# Altium PCB Proyecto_receptaculo_PCB.PcbDoc (part 2 of 2)
Units mm, origin at the board's own origin, x right, y up, seen from the top; angles counter-clockwise.
Board outline 153.95 x 97.18 mm, 4 copper layers (Top Layer, Sources, Ground, Bottom Layer), stack 0.603 mm thick; 102 components, 76 nets, 373 pads, 119 vias.
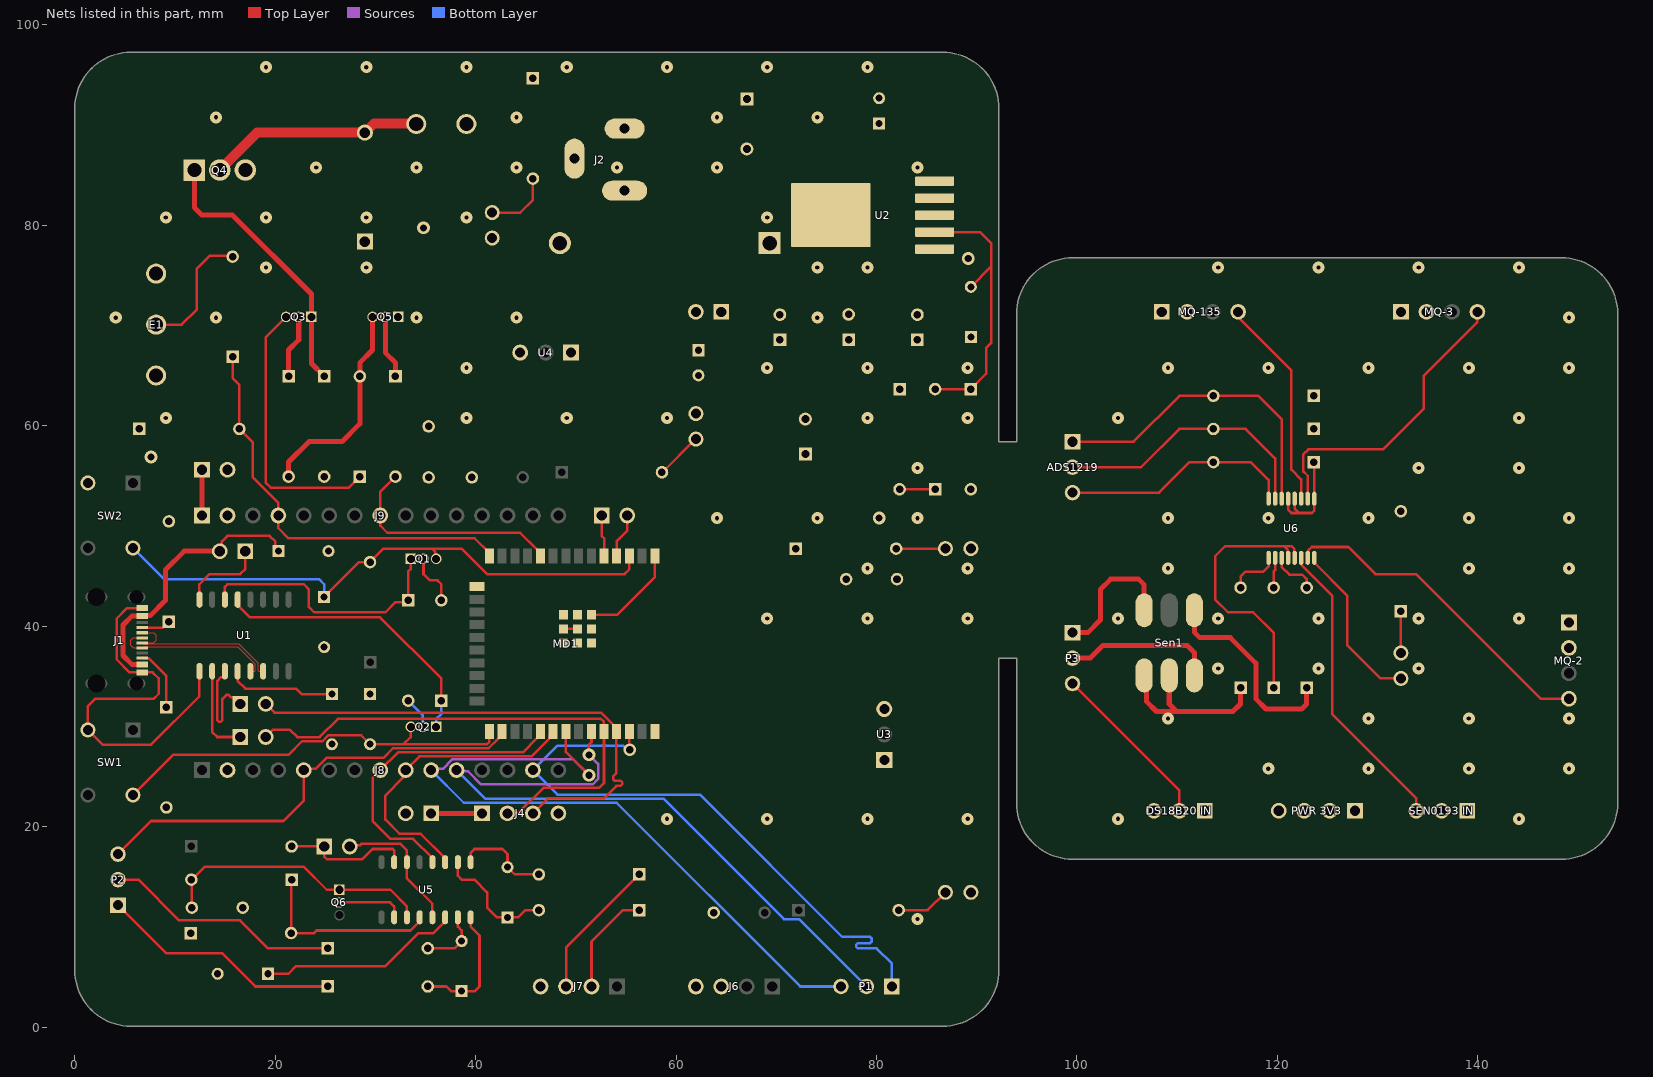
[diagram p4: the nets of this part, all layers, seen from the top]

## Via types
v1: diameter 1.2, hole 0.42, Top Layer to Bottom Layer, tented both sides, 102 vias
v2: diameter 1.27, hole 0.711, Top Layer to Bottom Layer, 5 vias
v3: diameter 1.27, hole 0.711, Top Layer to Bottom Layer, tented both sides, 4 vias
v4: diameter 5.3, hole 3, Top Layer to Bottom Layer, 4 vias
v5: diameter 5, hole 3, Top Layer to Bottom Layer, 3 vias
v6: diameter 1.2, hole 0.42, Top Layer to Bottom Layer, tented top, 1 vias

## Nets (pads, with @x,y where several pads share a name; then routed paths per layer and width w, separated by ;. In a path a pad name is that pad's centre, name@x,y a point inside that pad or via, vN(x,y) a via of type N, cw(c..) or ccw(c..) an arc to the next point about the centre after c; other vN are vias at no path point) (continued)
3V3_VCC: "DS18B20 IN.1" "PWR 3V3.1" "PWR 3V3.2" "SEN0193 IN.2" MQ-2.1 MQ-3.1 MQ-135.1 R4.1 R5.1 R26.2 R27.1 R28.1 Sen1.1 U6.9 U6.12 U6.13 | length 30.9
  Top Layer w0.254: U6.13@121.073,52.734 121.073,51.633 121.398,51.308 122.16,51.308 ; U6.12@121.723,52.734 121.723,51.745 122.16,51.308 ; R28.1@123.604,56.388 123.673,56.319 U6.9@123.673,52.734 123.673,51.551 123.43,51.308 122.16,51.308
  Top Layer w0.5: Sen1.1@111.706,41.604 111.706,39.41 112.254,38.862 115.302,38.862 117.842,36.322 117.842,32.766 118.858,31.75 122.414,31.75 122.922,32.258 R5.1@122.922,33.862
  other v1: 119.092,25.79 129.092,25.79 139.092,25.79 149.092,25.79 114.092,35.79 124.092,35.79 134.092,35.79 109.092,45.79 139.092,45.79 149.092,45.79 134.092,55.79 144.092,55.79 109.092,65.79 119.092,65.79 129.092,65.79 139.092,65.79 149.092,65.79 114.092,75.79 124.092,75.79 134.092,75.79 144.092,75.79
5V_DC-DC: C4.2 C5.1 C6.1 C7.1 L1.1 L2.1 L3.1 R6.1 R14.1 U3.3 V+Cnv.1
  other v1: 79.092,45.79 89.092,45.79 84.092,55.79 69.092,65.79 79.092,65.79 89.092,65.79
  other v2: 80.264,50.8
5V_EXTERN: J4.1 V+Ext.1 | length 5.1
  Top Layer w0.5: V+Ext.1@35.56,21.336 J4.1@40.64,21.336
5V_Winner: 5VWin.2 C9.1 U1.16 U4.3 V+Cnv.2 V+Ext.2 V+USB.1 | length 8.5
  Top Layer w0.254: U1.16@12.446,42.672 12.446,44.196 13.462,45.212 16.51,45.212 17.018,45.72 V+USB.1@17.018,47.498
  other v1: 39.092,65.79
  other v2: 7.62,56.896
+12_Vin: C2.2 C3.1 D2.1 E1.A1 In1.A1 J2.1 Q3.3 R9.1 R13.1 U2.4 U2.5 | length 27.4
  Top Layer w0.254: Q3.3@21.082,70.866 19.05,68.834 19.05,54.356 19.558,53.848 27.352,53.848 R9.1@28.448,54.944
  other v1: 19.092,75.79 29.092,75.79 24.092,85.79 34.092,85.79 44.092,85.79 54.092,85.79 64.092,85.79 84.092,85.79 19.092,95.79 29.092,95.79 39.092,95.79 49.092,95.79 59.092,95.79 69.092,95.79 79.092,95.79
  other v2: 34.798,79.756
AVDD: C11.1 Q6.1 R18.2 U5.3 | length 27.6
  Top Layer w0.254: C11.1@11.684,11.938 11.658,11.964 11.658,14.706 R18.2@11.632,14.732 11.684,14.732 12.954,16.002 22.86,16.002 25.146,13.716 Q6.1@26.416,13.716 31.496,13.716 33.147,12.065 U5.3@33.147,10.966
BASE: Q6.2 U5.2 | length 6.7
  Top Layer w0.254: Q6.2@26.416,12.446 31.474,12.446 31.877,12.043 U5.2@31.877,10.966
D+: J1.A6 J1.B6 U1.5 | length 16.2
  Top Layer w0.117: J1.A6@6.723,38.862 5.842,38.862 5.588,38.608 5.588,38.1 5.83,37.858 J1.B6@6.727,37.858 6.819,37.95 7.287,37.95 7.312,37.975 16.27,37.975 18.028,36.217 18.028,35.59 17.959,35.522 U1.5@17.526,35.522
  Top Layer w0.254: J1.A6@6.723,38.862 J1.A6@6.727,38.858
D-: J1.A7 J1.B7 U1.6 | length 17.2
  Top Layer w0.117: J1.B7@6.727,39.358 7.886,39.358 8.128,39.116 8.128,38.608 7.878,38.358 J1.A7@6.727,38.358 6.819,38.266 7.287,38.266 7.312,38.241 16.381,38.241 18.294,36.328 18.294,35.59 18.363,35.522 U1.6@18.796,35.522
DTR: Q2.1 R1.1 U1.13 | length 28.9
  Top Layer w0.254: U1.13@16.256,42.672 16.256,42.147 17.509,40.894 30.48,40.894 36.576,34.798 R1.1@36.576,32.592
  Bottom Layer w0.254: Q2.1@36.068,29.972 36.068,30.734 36.576,31.242 R1.1@36.576,32.592
EN: C1.1 MD1.3 Q1.3 R3.2 SW2.2 | length 58.1
  Top Layer w0.254: C1.1@24.892,42.926 28.368,46.402 R3.2@29.464,46.402 30.814,47.752 35.638,47.752 ; Q1.3@36.068,46.736 35.979,46.825 35.979,47.411 35.638,47.752 ; MD1.3@55.348,47.004 55.348,45.696 54.864,45.212 41.148,45.212 38.608,47.752 35.638,47.752
  Bottom Layer w0.254: SW2.2@5.806,47.804 8.906,44.704 24.384,44.704 24.892,44.196 C1.1@24.892,42.926
FB_XL4005E1: C6.2 R7.2 R8.1 U2.2 | length 27.9
  Top Layer w0.254: U2.2@85.788,79.326 90.346,79.326 91.44,78.232 91.44,75.906 ; R7.2@85.852,63.674 R8.1@89.408,63.674 90.932,65.198 90.932,67.748 91.44,68.256 91.44,75.906 ; C6.2@89.408,73.874 91.44,75.906
GND: "LED 3V3.2" "LED 5V.2" "LED 12V.2" "LED ESP32.2" C1.2 C2.1 C3.2 C4.1 C5.2 C7.2 C8.2 C9.2 C10.2 C11.2 C12.2 C15.2 C16.2 C17.1 D1.2 E1.A3 J1.A1-B12 J1.B1-A12 J2.2 J2.3 J3.2 J4.4 J6.3 J6.4 J7.4 J8.2 J9.2 MD1.1 MD1.15 MD1.38 MD1.39 Q4.3 Q5.1 R8.2 R12.2 R17.1 R25.1 R31.2 R32.2 SW1.3 SW2.3 U1.1 U2.1 U3.1 U4.1 U5.5 U5.14 | length 64.9
  Top Layer w0.254: J1.A1-B12@6.727,41.808 5.232,41.808 4.195,40.771 4.195,36.699 5.486,35.408 J1.B1-A12@6.727,35.408 7.772,35.408 8.382,34.798 8.382,33.274 7.874,32.766 2.032,32.766 1.306,32.04 SW1.3@1.306,29.666 2.778,28.194 7.62,28.194 12.446,33.02 U1.1@12.446,35.522 ; J3.2@27.432,18.034 27.537,18.139 28.449,18.139 28.598,18.288 32.512,18.288 33.147,17.653 U5.14@33.147,16.466 33.147,14.859 35.687,12.319 U5.5@35.687,10.966 ; MD1.39@48.768,39.754 MD1.39@50.168,39.754 ; MD1.39@51.568,41.154 51.574,41.148 54.102,41.148 57.888,44.934 MD1.1@57.888,47.004
  other v1: 84.092,10.79 59.092,20.79 69.092,20.79 79.092,20.79 89.092,20.79 69.092,40.79 79.092,40.79 89.092,40.79 64.092,50.79 74.092,50.79 84.092,50.79 9.092,60.79 39.092,60.79 49.092,60.79 59.092,60.79 79.092,60.79 89.092,60.79 4.092,70.79 14.092,70.79 34.092,70.79 44.092,70.79 74.092,70.79 9.092,80.79 19.092,80.79 29.092,80.79 39.092,80.79 69.092,80.79 14.092,90.79 44.092,90.79 64.092,90.79
  other v3: 89.154,76.708
  other v6: 74.092,90.79
GND2: "DS18B20 IN.3" "LED PWR.2" "PWR 3V3.3" "PWR 3V3.4" "SEN0193 IN.1" MQ-2.2 MQ-3.2 MQ-135.2 R29.1 R30.1 Sen1.4 Sen1.5 U6.4 U6.5 U6.8 | length 62.9
  Top Layer w0.254: Sen1.4@106.706,35.104 Sen1.4@106.92,34.89 ; R30.1@119.62,33.862 119.62,39.362 117.58,41.402 115.048,41.402 113.778,42.672 113.778,46.99 114.794,48.006 120.636,48.006 ; U6.4@121.073,46.834 121.035,46.872 121.035,47.607 120.636,48.006 ; U6.5@121.723,46.834 121.685,46.872 121.685,47.719 121.398,48.006 120.636,48.006 ; U6.8@123.673,46.834 123.673,46.359 126.986,43.046 126.986,38.1 130.288,34.798 132.32,34.798
  Top Layer w0.5: Sen1.4@106.92,34.89 106.92,32.512 107.936,31.496 109.968,31.496 ; Sen1.5@109.206,35.104 109.206,32.258 109.968,31.496 ; R29.1@116.318,33.862 116.318,32.258 115.556,31.496 109.968,31.496
  other v1: 104.092,20.79 144.092,20.79 109.092,30.79 129.092,30.79 139.092,30.79 149.092,30.79 104.092,40.79 114.092,40.79 124.092,40.79 134.092,40.79 144.092,40.79 109.092,50.79 119.092,50.79 129.092,50.79 139.092,50.79 149.092,50.79 104.092,60.79 144.092,60.79 149.092,70.79
IN_A+: P2.1 R20.1 | length 24.3
  Top Layer w0.254: P2.1@4.318,12.192 9.144,7.366 14.732,7.366 18.034,4.064 R20.1@25.226,4.064
IN_A-: P2.2 R21.1 | length 23.7
  Top Layer w0.254: P2.2@4.318,14.732 6.35,14.732 10.414,10.668 16.51,10.668 19.304,7.874 R21.1@25.226,7.874
IN_B+: J7.2 R22.1 | length 10.5
  Top Layer w0.254: J7.2@51.562,4.064 51.562,8.538 54.708,11.684 R22.1@56.308,11.684
IN_B-: J7.3 R23.1 | length 14.2
  Top Layer w0.254: J7.3@49.022,4.064 49.022,7.954 R23.1@56.308,15.24
INNA: C13.2 R21.2 U5.7 | length 6.2
  Top Layer w0.254: R21.2@35.226,7.874 37.886,7.874 C13.2@38.608,8.596 38.608,9.652 38.227,10.033 U5.7@38.227,10.966
INNB: C14.2 R23.2 U5.9 | length 9.7
  Top Layer w0.254: U5.9@39.497,16.466 39.497,17.399 39.878,17.78 42.672,17.78 43.18,17.272 C14.2@43.18,15.962 43.902,15.24 R23.2@46.308,15.24
INPA: C13.1 R20.2 U5.8 | length 12.8
  Top Layer w0.254: R20.2@35.226,4.064 37.084,4.064 37.552,3.596 C13.1@38.608,3.596 39.918,3.596 40.386,4.064 40.386,9.144 39.497,10.033 U5.8@39.497,10.966
INPB: C14.1 R22.2 U5.10 | length 12.3
  Top Layer w0.254: U5.10@38.227,16.466 38.227,15.113 38.608,14.732 39.878,14.732 41.148,13.462 41.148,11.938 42.124,10.962 C14.1@43.18,10.962 44.236,10.962 44.958,11.684 R22.2@46.308,11.684
IO0: C17.2 MD1.25 Q2.3 SW1.2 | length 41.6
  Top Layer w0.254: SW1.2@5.806,23.166 9.818,27.178 21.336,27.178 22.692,28.534 24.714,28.534 25.291,29.111 28.587,29.111 C17.2@29.464,28.234 31.353,28.234 31.359,28.24 32.812,28.24 ; Q2.3@33.528,29.972 33.528,28.956 32.812,28.24 ; MD1.25@41.378,29.504 41.372,29.498 41.372,28.478 41.134,28.24 32.812,28.24
Net5VWin_1: 5VWin.1 J9.1 | length 4.6
  Top Layer w0.5: J9.1@12.7,51.054 5VWin.1@12.7,55.626
NetADS1219_1: ADS1219.1 R4.2 U6.14 | length 31.7
  Top Layer w0.254: ADS1219.1@99.554,58.42 105.65,58.42 110.222,62.992 R4.2@113.604,62.992 118.096,62.992 120.423,60.665 U6.14@120.423,52.734
NetADS1219_2: ADS1219.2 R27.2 U6.15 | length 27
  Top Layer w0.254: ADS1219.2@99.554,55.88 106.412,55.88 110.222,59.69 R27.2@113.604,59.69 116.826,59.69 119.773,56.743 U6.15@119.773,52.734
NetADS1219_3: ADS1219.3 R28.2 U6.16 | length 23.4
  Top Layer w0.254: ADS1219.3@99.554,53.34 108.19,53.34 111.238,56.388 R28.2@113.604,56.388 117.334,56.388 119.123,54.599 U6.16@119.123,52.734
NetC15_1: C15.1 U1.4 | length 10.9
  Top Layer w0.254: U1.4@16.256,35.522 16.256,34.544 17.018,33.782 22.098,33.782 22.646,33.234 C15.1@25.654,33.234
NetD1_1: D1.1 L1.2 L2.2 L3.2 U2.3 U2.6
  other v1: 74.092,75.79 79.092,75.79
NetD2_2: D2.2 In1.A2 Q4.2 | length 21.5
  Top Layer w0.254: In1.A2@34.022,90.17 In1.A2@34.076,90.116
  Top Layer w1: Q4.2@14.478,85.523 18.213,89.258 D2.2@28.956,89.258 29.868,90.17 In1.A2@34.022,90.17
"NetDS18B20 IN_2": "DS18B20 IN.2" P3.3 | length 17.1
  Top Layer w0.254: P3.3@99.554,34.29 110.222,23.622 110.222,21.59
NetE1_A2: E1.A2 R24.2 | length 12.9
  Top Layer w0.254: E1.A2@8.128,70.104 10.668,70.104 12.192,71.628 12.192,75.692 13.462,76.962 15.668,76.962 R24.2@15.748,76.882
NetJ1_A5: J1.A5 R31.1 | length 2.9
  Top Layer w0.254: J1.A5@6.727,39.858 8.79,39.858 R31.1@9.398,40.466
NetJ1_B5: J1.B5 R32.1 | length 6.3
  Top Layer w0.254: J1.B5@6.727,36.858 6.75,36.835 7.367,36.835 9.144,35.058 R32.1@9.144,31.924
NetJ5_1: J5.1 MD1.5 | length 4.2
  Top Layer w0.254: J5.1@52.578,51.054 52.578,49.022 52.832,48.768 52.832,47.028 MD1.5@52.808,47.004
NetJ5_2: J5.2 MD1.4 | length 4.5
  Top Layer w0.254: MD1.4@54.078,47.004 54.102,47.028 54.102,48.514 55.118,49.53 J5.2@55.118,51.054
NetJ8_5: J8.5 MD1.26 P2.3 | length 45.4
  Top Layer w0.254: P2.3@4.318,17.272 7.62,20.574 20.828,20.574 22.86,22.606 J8.5@22.86,25.654 22.988,25.782 24.026,25.782 25.112,26.868 30.788,26.868 31.756,27.836 41.302,27.836 42.122,28.657 42.122,28.678 42.648,29.204 MD1.26@42.648,29.504
NetJ8_8: J8.8 MD1.29 U5.12 | length 31.1
  Top Layer w0.254: U5.12@35.687,16.466 35.687,16.866 33.757,18.796 31.496,18.796 29.718,20.574 29.718,24.892 J8.8@30.48,25.654 32.258,27.432 44.708,27.432 46.135,28.859 46.135,29.181 MD1.29@46.458,29.504
NetJ8_9: J8.9 MD1.30 U5.11 | length 30.2
  Top Layer w0.254: U5.11@36.957,16.466 36.957,16.866 34.519,19.304 32.39,19.304 30.988,20.706 30.988,23.114 32.768,24.894 32.768,25.402 J8.9@33.02,25.654 34.394,27.028 45.574,27.028 47.405,28.859 47.405,29.181 MD1.30@47.728,29.504
NetJ8_10: J8.10 MD1.31 P1.3 | length 72
  Top Layer w0.254: MD1.31@48.998,29.504 48.998,27.456 v3(51.308,25.146)
  Sources w0.254: J8.10@35.56,25.654 35.688,25.782 36.726,25.782 37.66,26.716 49.738,26.716 v3(51.308,25.146)
  Bottom Layer w0.254: J8.10@35.56,25.654 38.816,22.398 54.062,22.398 72.396,4.064 P1.3@76.454,4.064
NetJ8_11: J8.11 MD1.33 P1.2 | length 70
  Top Layer w0.254: v3(51.308,27.178) 51.308,28.194 51.562,28.448 51.562,29.48 MD1.33@51.538,29.504
  Sources w0.254: J8.11@38.1,25.654 38.228,25.526 39.266,25.526 40.558,24.234 51.686,24.234 52.22,24.768 52.22,26.266 v3(51.308,27.178)
  Bottom Layer w0.254: J8.11@38.1,25.654 40.952,22.802 58.738,22.802 70.758,10.782 72.276,10.782 P1.2@78.994,4.064
NetJ8_14: J8.14 MD1.36 P1.1 | length 61.4
  Top Layer w0.254: 55.348,28.424 MD1.36@55.348,29.504
  Bottom Layer w0.254: v3(55.372,27.686) 55.097,27.686 54.693,28.09 48.156,28.09 J8.14@45.72,25.654 48.168,23.206 62.392,23.206 76.581,9.017 79.353,9.017 79.502,8.868 79.502,8.531 79.353,8.382 78.127,8.382 77.978,8.233 77.978,8.023 78.127,7.874 80.01,7.874 81.534,6.35 P1.1@81.534,4.064
NetJ9_4: J9.4 MD1.14 R24.1 R25.2 | length 41.4
  Top Layer w0.254: R24.1@15.748,66.882 15.748,64.77 16.43,64.088 R25.2@16.43,59.69 17.78,58.34 17.78,54.864 20.32,52.324 J9.4@20.32,51.054 20.32,49.784 21.336,48.768 39.914,48.768 41.378,47.304 MD1.14@41.378,47.004
NetJ9_8: J9.8 MD1.10 R11.2 | length 23
  Top Layer w0.254: R11.2@32.004,54.944 30.48,53.42 J9.8@30.48,51.054 J9.8@30.48,51.054 30.481,50.037 31.183,49.335 44.448,49.335 46.135,47.649 46.135,47.327 MD1.10@46.458,47.004
"NetLED 3V3_1": "LED 3V3.1" R16.2 | length 5.4
  Top Layer w0.254: R16.2@82.216,11.684 85.09,11.684 86.868,13.462
"NetLED 5V_1": "LED 5V.1" R14.2 | length 4.9
  Top Layer w0.254: R14.2@81.962,47.752 86.868,47.752
"NetLED 12V_1": "LED 12V.1" R13.2 | length 6.7
  Top Layer w0.254: 41.656,81.28 44.45,81.28 45.72,82.55 R13.2@45.72,84.662
"NetLED ESP32_1": "LED ESP32.1" R15.2 | length 4.7
  Top Layer w0.254: R15.2@58.594,55.372 58.634,55.372 61.936,58.674 61.976,58.674
"NetLED PWR_1": "LED PWR.1" R26.1 | length 4.1
  Top Layer w0.254: 132.32,37.338 R26.1@132.32,41.482
NetMQ-2_4: MQ-2.4 U6.7 | length 33.2
  Top Layer w0.254: U6.7@123.023,46.834 123.061,46.872 123.061,47.554 123.422,47.915 127.077,47.915 129.78,45.212 133.844,45.212 146.29,32.766 MQ-2.4@149.084,32.766
NetMQ-3_4: MQ-3.4 U6.10 | length 30.3
  Top Layer w0.254: U6.10@123.023,52.734 123.023,55.023 122.598,55.448 122.598,57.171 123.085,57.658 130.542,57.658 134.606,61.722 134.606,65.01 139.953,70.357 139.953,70.961 MQ-3.4@140.208,71.217
NetMQ-135_4: MQ-135.4 U6.11 | length 21.2
  Top Layer w0.254: MQ-135.4@116.078,71.374 116.33,71.122 116.33,70.614 121.398,65.546 121.398,55.626 122.373,54.651 U6.11@122.373,52.734
NetP3_1: P3.1 Sen1.3 | length 13.9
  Top Layer w0.5: P3.1@99.554,39.37 101.078,39.37 102.348,40.64 102.348,43.688 103.364,44.704 106.158,44.704 106.706,44.156 Sen1.3@106.706,41.604
NetP3_2: P3.2 Sen1.6 | length 15.3
  Top Layer w0.5: P3.2@99.554,36.83 101.332,36.83 102.602,38.1 110.984,38.1 111.706,37.378 Sen1.6@111.706,35.104
NetQ1_2: Q1.2 R1.2 | length 5.3
  Top Layer w0.254: Q1.2@34.798,46.736 34.798,45.212 35.433,44.577 36.195,44.577 36.576,44.196 R1.2@36.576,42.592
NetQ2_2: Q2.2 R2.2 | length 3.3
  Bottom Layer w0.254: R2.2@33.274,32.592 34.718,31.148 34.718,30.052 Q2.2@34.798,29.972
NetQ3_1: Q3.1 Q4.1 R12.1 | length 27.7
  Top Layer w0.5: Q4.1@11.938,85.523 11.938,81.788 12.7,81.026 15.748,81.026 23.622,73.152 Q3.1@23.622,70.866 23.622,66.214 R12.1@24.892,64.944
NetQ3_2: Q3.2 R10.1 | length 6.3
  Top Layer w0.5: R10.1@21.336,64.944 21.336,67.564 22.352,68.58 Q3.2@22.352,70.866
NetQ5_2: Q5.2 R11.1 | length 6.3
  Top Layer w0.5: Q5.2@30.988,70.866 30.988,67.31 32.004,66.294 R11.1@32.004,64.944
NetQ5_3: Q5.3 R9.2 R10.2 | length 21.3
  Top Layer w0.5: R10.2@21.336,54.944 21.336,56.388 23.368,58.42 26.67,58.42 28.448,60.198 R9.2@28.448,64.944 28.448,66.294 29.718,67.564 Q5.3@29.718,70.866
NetR5_2: R5.2 U6.3 | length 4.8
  Top Layer w0.254: U6.3@120.423,46.834 120.423,45.933 121.205,45.151 122.475,45.151 122.907,44.719 122.907,43.877 R5.2@122.922,43.862
NetR6_2: R6.2 R7.1 | length 3.6
  Top Layer w0.254: R6.2@82.296,53.674 R7.1@85.852,53.674
NetR29_2: R29.2 U6.1 | length 5.2
  Top Layer w0.254: R29.2@116.318,43.862 116.318,44.958 116.826,45.466 118.604,45.466 119.112,45.974 119.112,46.823 U6.1@119.123,46.834
NetR30_2: R30.2 U6.2 | length 3
  Top Layer w0.254: R30.2@119.62,43.862 119.62,45.466 119.773,45.619 U6.2@119.773,46.834
"NetSEN0193 IN_3": "SEN0193 IN.3" U6.6 | length 30
  Top Layer w0.254: U6.6@122.373,46.834 122.411,46.796 122.411,46.114 125.462,43.063 125.462,31.242 133.844,22.86 133.844,21.59
RATE: J3.1 R19.2 U5.15 | length 13
  Top Layer w0.254: R19.2@21.632,18.034 J3.1@24.892,18.034 24.892,17.018 25.146,16.764 28.702,16.764 29.718,17.78 31.728,17.78 31.877,17.631 U5.15@31.877,16.466
RTS: Q1.1 R2.1 U1.14 | length 26.6
  Top Layer w0.254: U1.14@14.986,42.672 14.986,43.942 15.24,44.196 22.86,44.196 23.368,43.688 23.368,41.91 23.876,41.402 30.988,41.402 32.004,42.418 33.1,42.418 R2.1@33.274,42.592 33.274,45.466 33.528,45.72 Q1.1@33.528,46.736
RXD: J15.1 U1.3 | length 10.4
  Top Layer w0.254: U1.3@14.986,35.522 14.986,35.091 14.826,34.931 14.611,34.931 14.224,34.544 14.224,30.629 14.373,30.48 14.583,30.48 14.732,30.629 14.732,32.766 15.135,33.169 15.345,33.169 15.598,32.916 15.852,32.916 J15.1@16.51,32.258
RXDO: J4.2 J14.2 MD1.34 | length 52.3
  Top Layer w0.254: J14.2@19.05,28.956 19.794,29.7 21.447,29.7 22.209,28.938 24.422,28.938 26.257,30.774 52.502,30.774 52.79,30.486 52.79,29.522 MD1.34@52.808,29.504 52.808,24.36 52.324,23.876 46.758,23.876 44.346,21.464 43.308,21.464 J4.2@43.18,21.336
TXD: J14.1 U1.2 | length 9.1
  Top Layer w0.254: U1.2@13.716,35.522 13.716,29.464 14.224,28.956 J14.1@16.51,28.956
TXD0: J4.3 J15.2 MD1.35 | length 52.6
  Top Layer w0.254: J15.2@19.05,32.258 19.916,31.392 52.512,31.392 53.755,30.149 53.755,29.827 MD1.35@54.078,29.504 54.044,29.47 54.044,25.342 53.709,25.007 53.709,24.753 53.858,24.604 54.461,24.604 54.61,24.456 54.61,24.221 54.461,24.072 54.044,24.072 52.798,22.826 47.21,22.826 J4.3@45.72,21.336
VBG: C12.1 U5.6 | length 20.3
  Top Layer w0.254: C12.1@19.264,5.334 21.336,5.334 22.098,6.096 30.988,6.096 34.29,9.398 35.789,9.398 36.957,10.566 U5.6@36.957,10.966
VCC_USB: C16.1 J1.A4-B9 J1.B4-A9 V+USB.2 | length 27.7
  Top Layer w0.254: V+USB.2@14.682,47.702 14.682,48.464 15.24,49.022 19.446,49.022 20.015,48.453 C16.1@20.015,47.803
  Top Layer w0.5: J1.B4-A9@6.727,36.208 5.702,36.208 4.826,37.084 4.826,40.132 5.702,41.008 J1.A4-B9@6.727,41.008 6.777,41.058 7.53,41.058 9.065,42.593 9.065,45.641 10.922,47.498 V+USB.2@14.478,47.498 V+USB.2@14.682,47.702 ; C16.1@20.015,47.803 C16.1@20.32,47.498
VFB: R17.2 R18.1 U5.4 | length 19.1
  Top Layer w0.254: R18.1@21.632,14.732 21.59,14.69 R17.2@21.59,9.398 23.876,9.398 24.13,9.652 33.503,9.652 34.417,10.566 U5.4@34.417,10.966
pads on no net: J1.1 J1.2 J1.3 J1.4 J1.A8 J1.B8 J8.1 J8.3 J8.4 J8.6 J8.7 J8.12 J8.13 J8.15 J9.3 J9.5 J9.6 J9.7 J9.9 J9.10 J9.11 J9.12 J9.13 J9.14 J9.15 MD1.6 MD1.7 MD1.8 MD1.9 MD1.11 MD1.12 MD1.13 MD1.16 MD1.17 MD1.18 MD1.19 MD1.20 MD1.21 MD1.22 MD1.23 MD1.24 MD1.27 MD1.28 MD1.32 MD1.37 MQ-2.3 MQ-3.3 MQ-135.3 Sen1.2 SW1.1 SW1.4 SW2.1 SW2.4 U1.7 U1.8 U1.9 U1.10 U1.11 U1.12 U1.15 U5.13
copper on no net:
  other v4: 5.2,5.19 87,5.19 5.2,92.19 87,92.19
  other v5: 99.176,22.19 148.476,22.19 99.176,71.69

## Polygon pours and split planes (outlines as drawn)
GND on Bottom Layer "GND_L04_P026" (solid, remove dead copper, pour order 26): 88.9,97.282 91.694,94.488 91.694,2.794 89.002,0.102 3.2,0.102 0.004,3.298 0.004,93.984 3.302,97.282
GND2 on Bottom Layer "GND2_L04_P015" (solid, remove dead copper, pour order 15): 150.608,76.708 153.91,73.406 153.91,20.066 150.608,16.764 97.014,16.764 94.488,19.29 94.488,73.928 97.268,76.708
GND on Ground "GND_L03_P027" (solid, remove dead copper, pour order 27): 88.9,97.282 91.694,94.488 91.694,2.794 89.002,0.102 3.2,0.102 0.004,3.298 0.004,93.984 3.302,97.282
GND2 on Ground "GND2_L03_P014" (solid, remove dead copper, pour order 14): 150.608,76.708 153.91,73.406 153.91,20.066 150.608,16.764 97.014,16.764 94.488,19.29 94.488,73.928 97.268,76.708
5V_Winner on Sources "5V_WINNER_L02_P009" (solid, pour order 9): 62.738,73.914 62.944,73.708 62.944,70.564 62.484,70.104 46.482,70.104 45.466,69.088 45.466,65.786 44.704,65.024 38.608,65.024 36.83,63.246 36.83,54.864 35.052,53.086 17.018,53.086 16.51,52.578 16.51,49.784 17.272,49.022 18.034,49.022 18.288,48.768 18.288,24.892 19.304,23.876 41.656,23.876 41.91,23.622 41.91,20.32 41.656,20.066 4.826,20.066 4.318,20.574 4.318,56.896 5.588,58.166 27.432,58.166 35.306,66.04 35.306,70.358 38.862,73.914 42.418,73.914
NetD1_1 on Sources "NETD1_1_L02_P006" (solid, pour order 6): 67.056,80.264 67.056,70.612 67.818,69.85 85.344,69.85 86.36,70.866 86.36,74.422 85.852,74.93 82.55,74.93 81.534,75.946 81.534,80.01 81.788,80.264 87.63,80.264 87.884,80.518 87.884,81.534 87.63,81.788 82.042,81.788 81.534,82.296 81.534,84.328 80.518,85.344 69.85,85.344 68.834,84.328 68.834,81.788
3V3_VCC on Sources "3V3_VCC_L02_P013" (solid, remove dead copper, pour order 13): 150.608,76.708 153.91,73.406 153.91,20.066 150.608,16.764 97.014,16.764 94.488,19.29 94.488,73.928 97.268,76.708
+12_Vin on Sources "+12_VIN_L02_P004" (solid, pour order 4): 9.144,95.504 10.414,96.774 81.534,96.774 82.804,95.504 82.804,90.17 84.836,88.138 87.376,88.138 88.392,87.122 88.392,82.55 87.884,82.042 83.566,82.042 82.296,83.312 82.296,85.598 81.28,86.614 70.104,86.614 64.516,81.026 46.228,81.026 41.91,76.708 36.322,76.708 34.29,74.676 27.178,67.564 4.064,67.564 2.54,69.088 2.54,85.09 9.144,91.694
5V_DC-DC on Sources "5V_DC-DC_L02_P007" (solid, pour order 7): 63.754,72.644 66.294,72.644 66.548,72.39 66.548,70.104 67.056,69.596 87.376,69.596 88.392,70.612 90.424,70.612 91.186,69.85 91.186,32.004 89.916,30.734 73.406,30.734 70.612,33.528 70.612,54.864 68.326,57.15 68.326,61.722 66.604,63.444 60.508,63.444 60.198,63.754 60.198,68.834 60.706,69.342 62.738,69.342 63.246,69.85 63.246,72.136
3V3_LDO_Sens on Sources "3V3_LDO_SENS_L02_P008" (solid, pour order 8): 73.406,30.226 89.916,30.226 91.186,28.956 91.186,4.064 88.392,1.27 3.81,1.27 1.27,3.81 1.27,18.796 2.032,19.558 71.882,19.558 72.898,20.574 72.898,29.718
3V3_LDO_EPS32 on Sources "3V3_LDO_EPS32_L02_P022" (solid, pour order 22): 58.42,69.596 60.198,67.818 60.198,48.006 57.404,45.212 36.068,45.212 34.798,43.942 34.798,36.576 33.528,35.306 19.812,35.306 19.05,36.068 19.05,48.26 23.368,52.578 35.56,52.578 37.846,54.864 37.846,62.484 39.37,64.008 44.958,64.008 45.974,65.024 45.974,68.834 46.736,69.596
3V3_VCC on Top Layer "3V3_VCC_L01_P016" (solid, remove dead copper, pour order 16): 150.608,76.708 153.91,73.406 153.91,20.066 150.608,16.764 97.014,16.764 94.488,19.29 94.488,73.928 97.268,76.708
5V_Winner on Top Layer "5V_WINNER_L01_P023" (solid, remove dead copper, pour order 23): 62.738,73.914 62.944,73.708 62.944,70.564 62.484,70.104 46.482,70.104 45.466,69.088 45.466,65.786 44.704,65.024 38.608,65.024 36.83,63.246 36.83,54.864 35.052,53.086 17.018,53.086 16.51,52.578 16.51,49.784 17.272,49.022 18.034,49.022 18.288,48.768 18.288,24.892 19.304,23.876 41.656,23.876 41.91,23.622 41.91,20.32 41.656,20.066 4.826,20.066 4.318,20.574 4.318,56.896 5.588,58.166 27.432,58.166 35.306,66.04 35.306,70.358 38.862,73.914 42.418,73.914
GND on Top Layer "GND_L01_P028" (solid, remove dead copper, pour order 28): 88.9,97.282 91.694,94.488 91.694,2.794 89.002,0.102 3.2,0.102 0.004,3.298 0.004,93.984 3.302,97.282
NetD1_1 on Top Layer "NETD1_1_L01_P000" (solid, remove dead copper, pour order 0): 67.056,80.264 67.056,70.612 67.818,69.85 85.344,69.85 86.36,70.866 86.36,74.422 85.852,74.93 82.55,74.93 81.534,75.946 81.534,80.01 81.788,80.264 87.63,80.264 87.884,80.518 87.884,81.534 87.63,81.788 82.042,81.788 81.534,82.296 81.534,84.328 80.518,85.344 69.85,85.344 68.834,84.328 68.834,81.788
+12_Vin on Top Layer "+12_VIN_L01_P003" (solid, remove dead copper, pour order 3): 9.144,95.504 10.414,96.774 81.534,96.774 82.804,95.504 82.804,90.17 84.836,88.138 87.376,88.138 88.392,87.122 88.392,82.55 87.884,82.042 83.566,82.042 82.296,83.312 82.296,85.598 81.28,86.614 70.104,86.614 64.516,81.026 46.228,81.026 41.91,76.708 36.322,76.708 34.29,74.676 27.178,67.564 3.81,67.564 2.54,68.834 2.54,85.09 9.144,91.694
3V3_LDO_Sens on Top Layer "3V3_LDO_SENS_L01_P011" (solid, remove dead copper, pour order 11): 73.406,30.226 89.916,30.226 91.186,28.956 91.186,4.064 88.392,1.27 3.81,1.27 1.27,3.81 1.27,18.796 2.032,19.558 71.882,19.558 72.898,20.574 72.898,29.718
5V_DC-DC on Top Layer "5V_DC-DC_L01_P012" (solid, remove dead copper, pour order 12): 63.754,72.644 66.294,72.644 66.548,72.39 66.548,70.104 67.056,69.596 87.376,69.596 88.392,70.612 90.424,70.612 91.186,69.85 91.186,32.004 89.916,30.734 73.406,30.734 70.612,33.528 70.612,54.864 68.326,57.15 68.326,61.722 66.604,63.444 60.508,63.444 60.198,63.754 60.198,68.834 60.706,69.342 62.738,69.342 63.246,69.85 63.246,72.136
3V3_LDO_EPS32 on Top Layer "3V3_LDO_EPS32_L01_P024" (solid, remove dead copper, pour order 24): 58.42,69.596 60.198,67.818 60.198,48.006 57.404,45.212 36.068,45.212 34.798,43.942 34.798,36.576 33.528,35.306 19.812,35.306 19.05,36.068 19.05,48.26 23.368,52.578 35.56,52.578 37.846,54.864 37.846,62.484 39.37,64.008 44.958,64.008 45.974,65.024 45.974,68.834 46.736,69.596
GND on Top Layer "GND_L01_P005" (solid, pour order 5): 89.916,78.232 90.424,77.724 90.424,75.946 89.916,75.438 83.312,75.438 82.55,76.2 82.55,77.724 83.058,78.232

## Keep-outs
Keep-Out Layer:
  lines w0.254: 93.98,58.42 92.202,58.42 92.202,91.69 ccw(c86.614,91.69) 86.614,97.278 5.592,97.278 ccw(c5.592,91.69) 0.004,91.69 0.004,5.69 ccw(c5.592,5.69) 5.592,0.102 86.614,0.102 ccw(c86.614,5.69) 92.202,5.69 92.202,36.83 93.966,36.83 93.966,22.356 ccw(c99.554,22.356) 99.554,16.768 148.368,16.768 ccw(c148.368,22.356) 153.956,22.356 153.956,71.178 ccw(c148.368,71.178) 148.368,76.766 99.568,76.766 ccw(c99.568,71.178) 93.98,71.178 93.98,58.434

## Silkscreen, mask and mechanical layers (free items; w line width, h text height)
Top Overlay:
  drawing of 1338 lines, arcs and shapes, not listed
  text "D" at 33.528,95.758 h1
  text "12V" at 37.846,95.758 h1
  text "Motor" at 34.036,83.312 h1
  text "LJ12A3-4" at 5.08,78.486 h1
  text "12V" at 33.782,77.724 h1
  text "12V" at 2.032,74.168 h1 r90
  text "Out" at 2.032,68.834 h1 r90
  text "Sgn" at 138.647,66.667 h1
  text "Sgn" at 114.808,66.373 h1
  text "GND" at 110.045,66.333 h1
  text "3V" at 107.442,66.294 h1
  text "3V" at 131.572,66.294 h1
  text "GND" at 133.858,66.294 h1
  text "GND" at 2.032,63.5 h1 r90
  text "3V3 ESP32" at 37.846,58.928 h1
  text "RDY" at 96.252,57.912 h1 r90
  text "Gerson J. Tovar N." at 150.876,56.642 h1 r90
  text "Lotfi Dalal V." at 153.162,56.388 h1 r90
  text "SDA" at 96.252,54.61 h1 r90
  text "5V" at 77.978,51.562 h1
  text "SCL" at 96.252,51.308 h1 r90
  text "D-PS002" at 95.998,42.926 h1
  text "3V" at 145.02,39.624 h1 r90
  text "A+" at 96.76,38.608 h1 r90
  text "GND" at 145.02,36.322 h1 r90
  text "A-" at 96.76,36.068 h1 r90
  text "Do" at 96.76,33.274 h1 r90
  text "Sgn" at 144.687,31.242 h1 r90
  text "DS18B20" at 96.252,29.972 h1
  text "UART0" at 13.97,28.448 h1 r90
  text "Gerson J. Tovar N." at 88.392,22.352 h1 r90
  text "Lotfi Dalal V." at 90.678,22.098 h1 r90
  text "Tm Pr" at 2.794,19.812 h1
  text "Sgn" at 132.066,18.367 h1
  text "3V" at 135.622,18.288 h1
  text "GND" at 138.162,18.288 h1
  text "|_GND_|" at 118.52,18.218 h1
  text "|_3V_|" at 124.616,18.218 h1
  text "GND" at 105.904,18.034 h1
  text "Do" at 109.46,18.034 h1
  text "3V" at 112,18.034 h1
  text "DS18" at 1.778,16.256 h1 r90
  text "3V3 Sens" at 73.66,14.478 h1
  text "A-" at 1.778,13.97 h1 r90
  text "A+" at 1.778,11.43 h1 r90
  text "I2C" at 74.168,2.794 h1 r90
  text "Peso" at 44.196,2.286 h1 r90
  text "PWR 3V3" at 59.436,1.778 h1 r90
  text "|_GND_|" at 60.198,1.183 h1
  text "|_3V_|" at 66.294,1.183 h1
  text "GND" at 44.958,1.016 h1
  text "-In+" at 48.514,1.016 h1
  text "3V" at 53.34,1.016 h1
  text "RDY" at 74.422,1.016 h1
  text "SDA" at 77.724,1.016 h1
  text "SCL" at 81.026,1.016 h1
Bottom Overlay:
  drawing of 1454 lines, arcs and shapes, not listed
  text "Gerson J. Tovar N." at 42.926,94.234 h2
  text "Lotfi Dalal V." at 42.672,91.44 h2
  text "Proyecto de grado / Modalidad: monografia" at 66.802,82.042 h2
  text "Gerson J. Tovar N. & Lotfi Dalal V." at 152.146,72.898 h1.5
  text "Proyecto de grado / Modalidad: monografia" at 140.208,63.5 h1.5
  text "Desarrollo de un receptaculo de bajo costo para el monitoreo de calidad, de manera remota con tecnologia IoT, enfocado en comida de silo para ganaderia bovina." at 86.804,59.436 h2
Mechanical 1:
  lines w0.254: 92.456,36.83 92.456,58.42 ; 93.726,36.83 93.726,58.42

## Text inside footprints (layer, text, board x,y; h text height)
E1: Top Overlay "A1" at 7.598,80.248 h0 r270
In1: Top Overlay "A1" at 44.151,90.677 h0 r180
L1: Top 3D Body "RefDes2" at 70.993,67.615 h1.27 r90; Top Overlay "RefDes" at 70.993,67.932 h0 r90
L2: Top 3D Body "RefDes2" at 77.851,67.64 h1.27 r90; Top Overlay "RefDes" at 77.851,67.958 h0 r90; Top Overlay "REFDES" at 77.851,67.64 h0 r90
L3: Top 3D Body "RefDes2" at 84.709,67.615 h1.27 r90; Top Overlay "RefDes" at 84.709,67.932 h0 r90; Top Overlay "REFDES" at 84.709,67.615 h0 r90
"LED 3V3": Top Overlay "+" at 84.088,13.132 h0.8
"LED 5V": Top Overlay "+" at 84.088,47.422 h0.8
"LED 12V": Top Overlay "+" at 41.326,84.06 h0.8 r270
"LED ESP32": Top Overlay "+" at 62.306,55.894 h0.8 r90
"LED PWR": Top Overlay "+" at 131.99,40.118 h0.8 r270
U6: Top Overlay "RefDes" at 122.033,47.879 h0 r90